# Altium PCB main_pcb.PcbDoc
Units mil, origin at the board's own origin, x right, y up, seen from the top; angles counter-clockwise.
Board outline 3500 x 2000 mil, 2 copper layers (Top Layer, Bottom Layer); 20 components, 16 nets, 56 pads, 6 vias.
Unrouted connection lines stored in the file: 38.
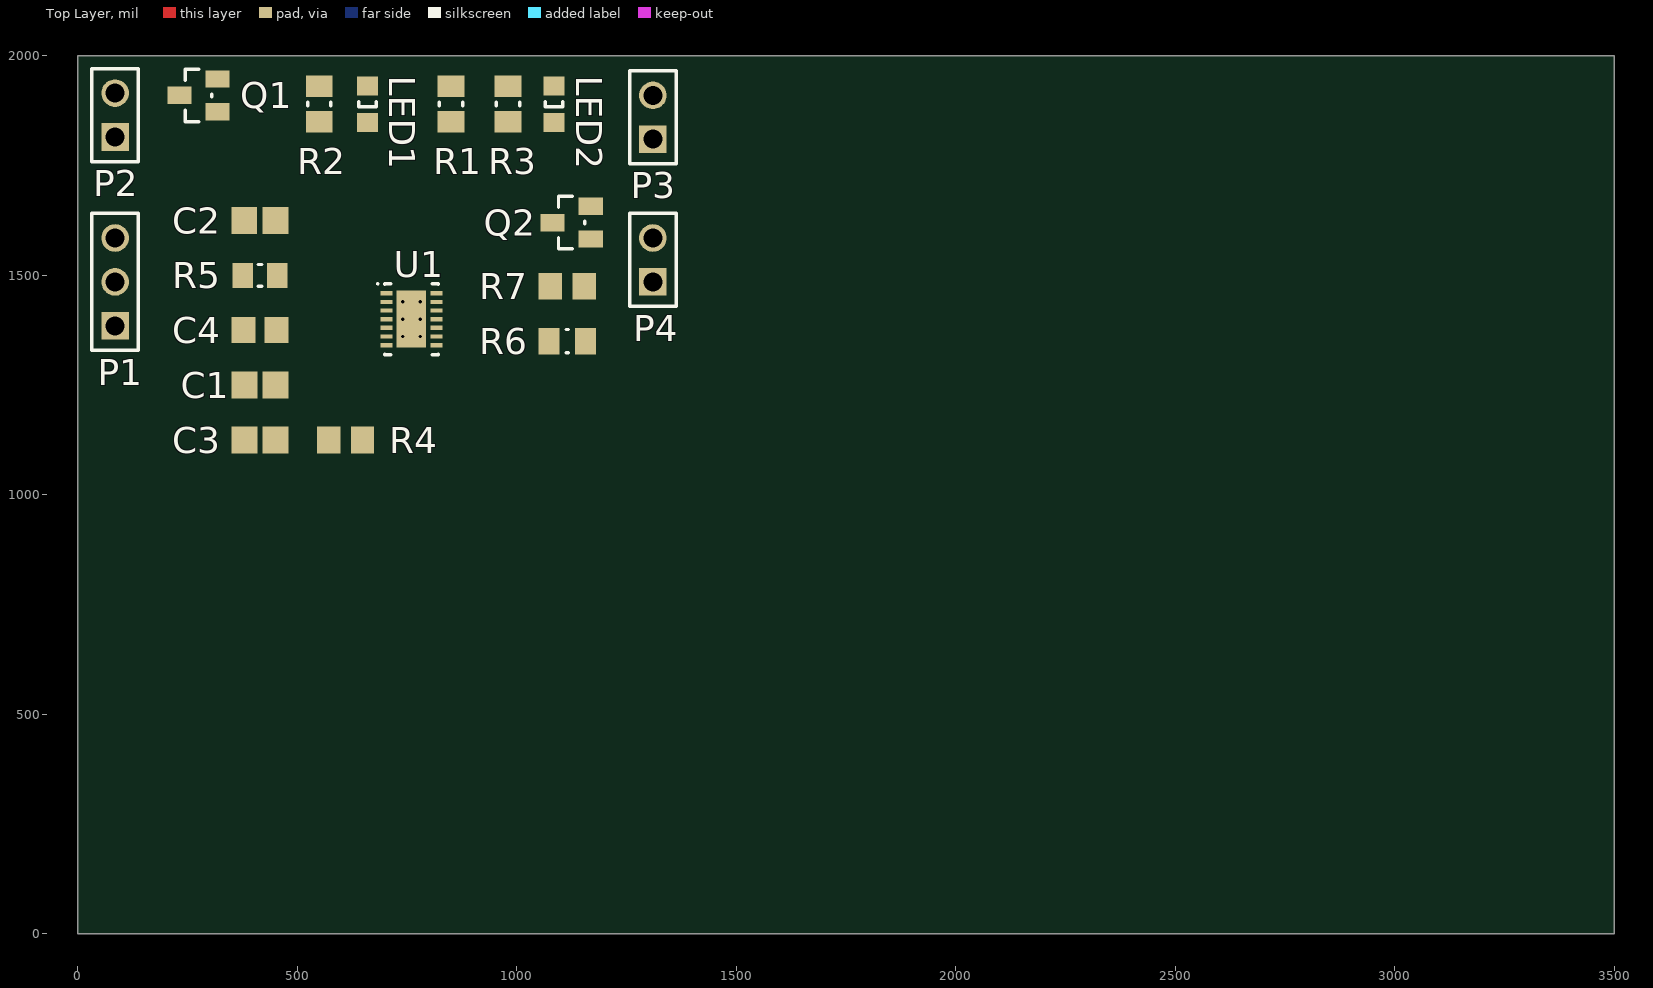
[diagram p0: Top Layer view]
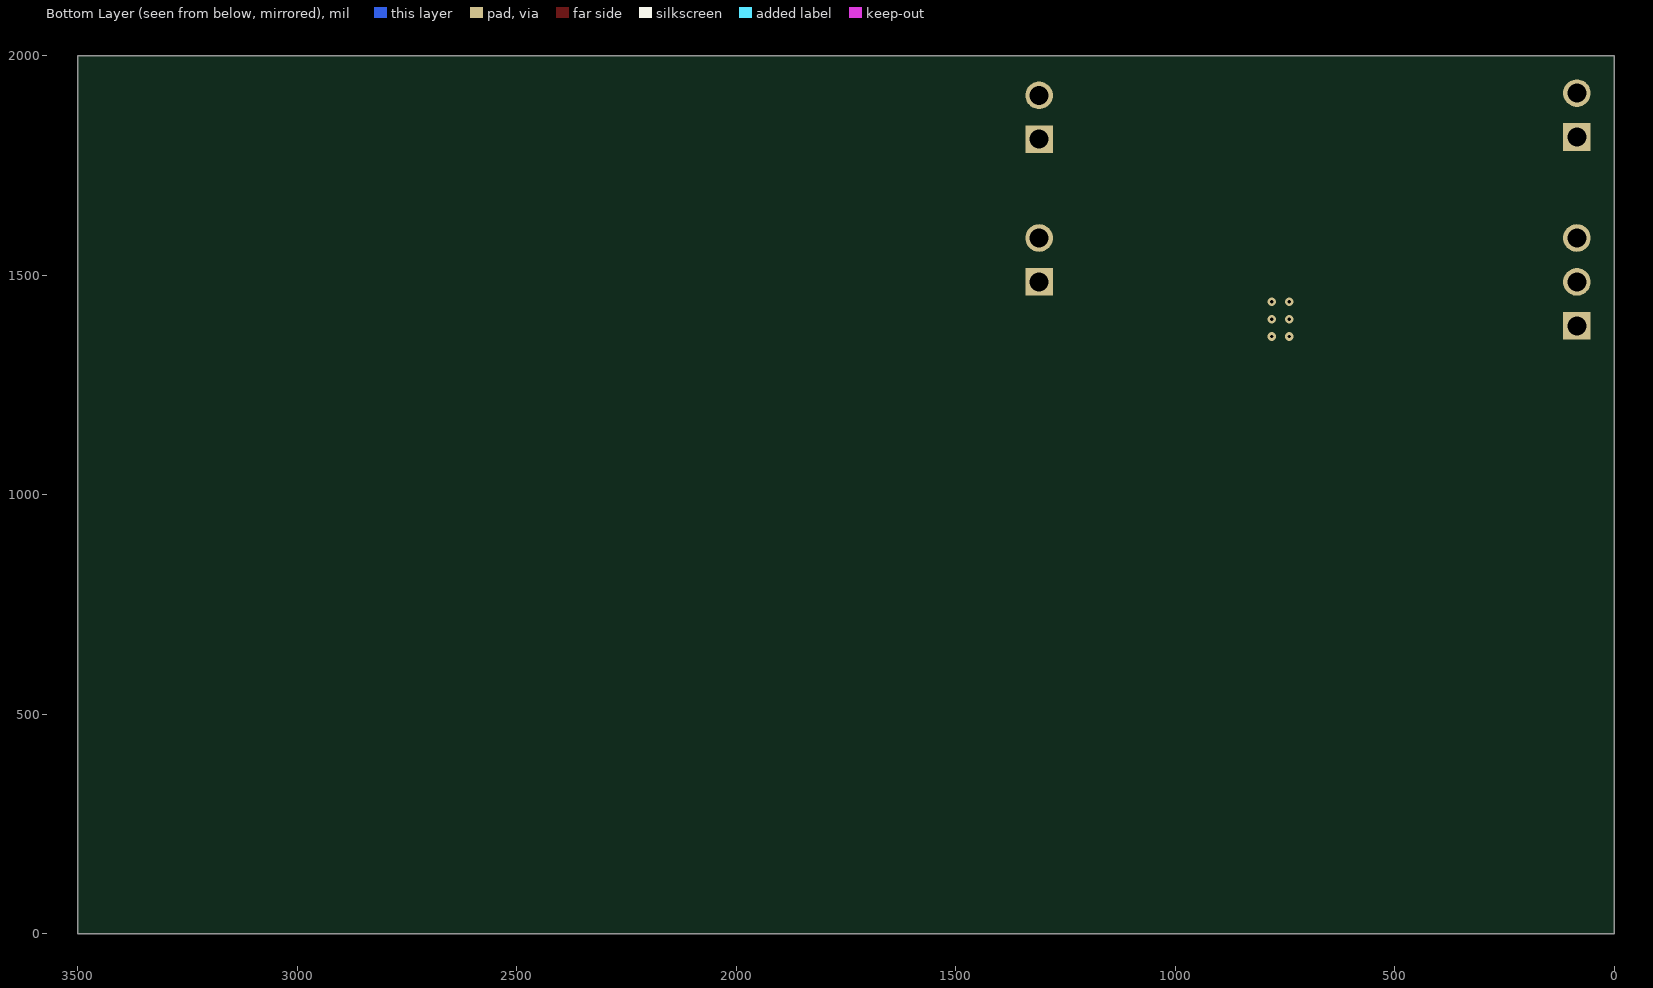
[diagram p1: Bottom Layer view, seen from below]

## Layer stack, top to bottom
Top Solder: solder mask 0.4, Solder Resist, Dk 3.5
Top Layer: signal copper 1.4
Dielectric 1: dielectric 12.6, FR-4, Dk 4.8
Bottom Layer: signal copper 1.4
Bottom Solder: solder mask 0.4, Solder Resist, Dk 3.5

## Board outline
0,0 3500,0 3500,2000 0,2000

## Design rules (kind name [scope] priority, off if disabled: settings)
BoardOutlineClearance [All] p1: gap=10 ignorepadtopadclearanceinfootprint=FALSE except(0: Arc-SplitContinuation Track-SplitContinuation SMDPad-SplitContinuation THPad-SplitContinuation Via-SplitContinuation Fill-SplitContinuation Poly-SplitContinuation Region-SplitContinuation Text-SplitContinuation)
Clearance [All] p1: gap=10 ignorepadtopadclearanceinfootprint=TRUE except(0: Arc-Hole Track-Hole SMDPad-Hole THPad-Hole Via-Hole Fill-Hole Poly-Hole Region-Hole Text-Hole)
PolygonConnect [All] p1: connectstyle=Relief reliefconductorwidth=10 reliefentries=4 polygonreliefangle="90 Angle" airgapwidth=10
RoutingVias [All] p1: holewidth=28 width=50 viastyle="Through Hole" minholewidth=28 minwidth=50 maxholewidth=28 maxwidth=50
SolderMaskExpansion [All] p1: expansion=4 istentingtop=FALSE
Width [All] p1: maxlimit=10 minlimit=10 preferedwidth=10
30 further rules are at their usual default settings.

## Components (designator, comment, footprint, x,y, rotation, side; value= is the part's Value field where it differs from the comment)
C1 "4.7uF" CAPC2013X145X50ML20T25 415,1250 r0 top
C2 "4.7uF" CAPC2013X145X50ML20T25 414.57,1625 r0 top
C3 "4.7uF" CAPC2013X145X50ML20T25 415,1125 r0 top
C4 "0.1uF" CAPC2013X135X45ML10T25 415,1375 r0 top
LED1 "Green" 0805_A 660,1890 r90 top
LED2 "Red" 0805_A 1085,1890 r90 top
P1 "Input" 61300311121 85,1485 r90 top
P2 "Output" 61300211121 85,1865 r90 top
P3 "Battery" 61300211121 1310,1860 r90 top
P4 "NTC" 61300211121 1310,1535 r90 top
Q1 "FDN340P" FP-527AG-MFG 275,1910 r180 top
Q2 "FDN340P" FP-527AG-MFG 1125,1620 r180 top
R1 "1K" RESC2013X50X30ML20T20 850,1890 r90 top
R2 "680" RESC2013X50X30ML20T20 550,1890 r90 top
R3 "680" RESC2013X50X30ML20T20 980,1890 r90 top
R4 "10K" RESC2013X70X40ML20T20 610,1125 r180 top
R5 "2K" RESC2013X60X35ML10T20 415,1500 r0 top
R6 "10K" RESC2012X145X30ML20T15 1115,1350 r180 top
R7 "100K" RESC2013X70X40ML20T20 1115,1475 r180 top
U1 "LTC4085EDE#TRPBF" LT-DE-14_V 760,1400 r0 top

## Footprints (in the part's own frame and the unit in brackets; to place one, negate y for a bottom-side part, rotate by r counter-clockwise, add the part's x,y. Pads: shape width x height; smd on the part's side, far side on the other; paste and mask are expansions set on the pad)
0805_A [mm] "Chip LED, 2-Leads, Body 2.0x1.3mm, IPC Medium Density"
  rect 1.1x1.2 smd: 1(-1.05,0) 2(1.05,0)
  silkscreen extent -0.15,-0.5 0.15,0.5, body extent -1,-0.62 1,0.63, height 0.68
61300211121 [mm] "Pin Header, pitch 2.54 mm, THT, Vertical, single row, 2p"
  rect 1.6x1.6 hole 1.1: 1(-1.27,0)
  round 1.6 hole 1.1: 2(1.27,0)
  silkscreen extent -2.69,-1.35 2.69,1.35, body extent -2.54,-1.27 2.54,1.27, height 8.57
61300311121 [mm] "Pin Header, pitch 2.54 mm, THT, Vertical, single row, 3p"
  rect 1.6x1.6 hole 1.1: 1(-2.54,0)
  round 1.6 hole 1.1: 2(0,0) 3(2.54,0)
  silkscreen extent -3.96,-1.35 3.96,1.35, body extent -3.81,-1.27 3.81,1.27, height 8.57
CAPC2013X135X45ML10T25 [mm] "Chip Capacitor, 2-Leads, Body 2.10x1.35mm, IPC Low Density"
  rect 1.4x1.5 smd: 1(-0.95,0) 2(0.95,0)
  body extent -1.05,-0.67 1.05,0.67, height 1.35
CAPC2013X145X50ML20T25 [mm] "Chip Capacitor, 2-Leads, Body 2.00x1.25mm, IPC Low Density"
  rect 1.5x1.55 smd: 1(-0.9,0) 2(0.9,0)
  body extent -1.1,-0.72 1.1,0.72, height 1.45
FP-527AG-MFG [mm]
  rect 1.4x1 smd paste+0 mask+0: 1(-1.1,0.95) 2(-1.1,-0.95) 3(1.1,0)
  silkscreen extent -0.76,-1.52 0.76,1.52, body extent -1.9,-1.62 1.9,1.62, height 0.25
LT-DE-14_V [mm] "SON, 14-Leads, Body 4x3mm, Pitch 0.5mm, Thermal Pad 3.3x1.7mm"
  rect 0.7x0.25 smd: 1(-1.45,1.5) 2(-1.45,1) 3(-1.45,0.5) 4(-1.45,0) 5(-1.45,-0.5) 6(-1.45,-1) 7(-1.45,-1.5) 8(1.45,-1.5) 9(1.45,-1) 10(1.45,-0.5) 11(1.45,0) 12(1.45,0.5) 13(1.45,1) 14(1.45,1.5)
  rect 1.7x3.3 smd: 15(0,0)
  silkscreen extent -2,-2.05 1.55,2.1, body extent -1.5,-2 1.5,2, height 0.8
RESC2012X145X30ML20T15 [mm] "Chip Resistor, 2-Leads, Body 2.01x1.25mm, IPC Low Density"
  rect 1.2x1.55 smd: 1(-1.05,0) 2(1.05,0)
  silkscreen extent -0.05,-0.67 0.05,0.67, body extent -1.11,-0.72 1.1,0.72, height 1.45
RESC2013X50X30ML20T20 [mm] "Chip Resistor, 2-Leads, Body 2.00x1.25mm, IPC Low Density"
  rect 1.25x1.55 smd: 1(-1.025,0) 2(1.025,0)
  silkscreen extent -0.1,-0.67 0.1,0.67, body extent -1.1,-0.72 1.1,0.72, height 0.5
RESC2013X60X35ML10T20 [mm] "Chip Resistor, 2-Leads, Body 2.00x1.25mm, IPC Low Density"
  rect 1.2x1.45 smd: 1(-1,0) 2(1,0)
  silkscreen extent -0.1,-0.63 0.1,0.63, body extent -1.05,-0.67 1.05,0.67, height 0.6
RESC2013X70X40ML20T20 [mm] "Chip Resistor, 2-Leads, Body 2.00x1.25mm, IPC Low Density"
  rect 1.35x1.55 smd: 1(-0.975,0) 2(0.975,0)
  body extent -1.1,-0.72 1.1,0.72, height 0.7

## Part data
C1 C2 C3: library part CMP-2007-01010-1, Manufacturer=Kemet, Part Number=C0805C475K3PACTU
C4: library part CMP-2100-03644-1, "Chip Capacitor, 0.1 uF, +/- 10%, 50 V, -55 to 125 degC, 0805 (2012 Metric), RoHS, Tape and Reel", Capacitance=100nF, Case Code (Imperial)=0805, Case Code (Metric)=2012, Dielectric=X7R, Dielectric Material=Ceramic, Insulation Resistance=10GR, Manufacturer=Murata, Max Operating Temperature=125degC, Min Operating Temperature=-55degC, Package Description="2-Pin Surface Mount Device, Body 2 x 1.25 mm", Package Quantity=1, Tolerance=10%, Voltage=50V, Case/Package=0805, Datasheet URL=http://psearch.en.murata.com/capacitor/product/GRM21BR71H104KA01%23.pdf, Datasheet Version=42675.0, Depth=1.25mm, Height=1.25mm, Lead Free=LeadFree, Length=2mm, Manufacturer URL=http://www.murata.com/, Material=Ceramic, Mount=SurfaceMount, Number of Pins=2, Package Reference=0805, Packaging=TapeandReel, Radiation Hardening=No, REACH SVHC=Unknown, RoHSCompliant=true, Termination=SMD/SMT, Thickness=0.053inch, Voltage Rating=50V, Voltage Rating (DC)=50V, Width=0.049inch
LED1: library part CMP-1426-00007-1, "SMD mono-color Chip LED, WL-SMCW, Green", Manufacturer="Wuerth Elektronik", PartNumber=150080GS75000, Color=Green, ComponentLink1Description="Manufacturer URL", ComponentLink1URL=http://www.we-online.com, ComponentLink2Description=Datasheet, ComponentLink2URL=http://katalog.we-online.com/led/datasheet/150080GS75000.pdf, PackageReference=0805_A
LED2: library part CMP-1426-00011-1, "SMD mono-color Chip LED, WL-SMCW, Red", Manufacturer="Wuerth Elektronik", PartNumber=150080RS75000, Color=Red, ComponentLink1Description="Manufacturer URL", ComponentLink1URL=http://www.we-online.com, ComponentLink2Description=Datasheet, ComponentLink2URL=http://katalog.we-online.com/led/datasheet/150080RS75000.pdf, PackageReference=0805_A
P1: library part CMP-1502-01062-1, "THT Vertical Pin Header WR-PHD, Pitch 2.54 mm, Single Row, 3 pins", Contact Resistance=20mOhm, Manufacturer="Wurth Elektronik", Operating Temperature=-40to105degC, Package Reference=61300311121, Rated Current=3A, Withstanding Voltage=500VAC, Working Voltage=250VAC, Datasheet URL=https://katalog.we-online.de/em/datasheet/6130xx11121.pdf, Gender=Male, Manufacturer URL=http://www.we-online.de, Mounting Technology=THT, Orientation=Vertical, Packaging=Bag, Part Number=61300311121, Pin Number=3, Pitch=2.54mm, Publisher=WurthElektronik, Row Number=Single
P2 P3 P4: library part CMP-1712-00002-4, "THT Vertical Pin Header WR-PHD, Pitch 2.54 mm, Single Row, 2 pins", Contact Resistance=20mOhm, Manufacturer="Wurth Elektronik", Operating Temperature=-40to105degC, Package Reference=61300211121, Rated Current=3A, Withstanding Voltage=500VAC, Working Voltage=250VAC, Datasheet URL=https://katalog.we-online.de/em/datasheet/6130xx11121.pdf, Gender=Male, Manufacturer URL=http://www.we-online.de, Mounting Technology=THT, Orientation=Vertical, Packaging=Bag, Part Number=61300211121, Pin Number=2, Pitch=2.54mm, Publisher=WurthElektronik, Row Number=Single
Q1 Q2: library part CMP-2100-03638-2, "MOSFET P-CH 20V 2A SSOT3", Case/Package=SOT-23, Continuous Drain Current (ID)=2A, Current Rating=-2A, Drain to Source Breakdown Voltage=-20V, Drain to Source Resistance=60mR, Drain to Source Voltage (Vdss)=20V, Gate to Source Voltage (Vgs)=8V, Input Capacitance=779pF, Max Operating Temperature=150°C, Max Power Dissipation=500mW, Min Operating Temperature=-55°C, On-State Resistance=70MR, Package Quantity=1, Threshold Voltage=-800mV, Contact Plating=Tin, Dual Supply Voltage=-20V, Element Configuration=Single, Fall Time=11ns, Height=0.94mm, Lead Free="Lead Free", Length=2.92mm, Mount="Surface Mount", Nominal Vgs=-800mV, Number of Elements=1, Number of Pins=3, Packaging="Tape and Reel", Power Dissipation=500mW, Radiation Hardening=No, Rds On Max=70mR, REACH SVHC="No SVHC", Rise Time=9ns, Termination=SMD/SMT, Turn-Off Delay Time=27ns, Turn-On Delay Time=10ns, Voltage Rating (DC)=-20V, Weight=0.03g, Width=3.05mm
R1: library part CMP-1013-00510-2, Manufacturer="Vishay Dale", Part Number=CRCW08051K00FKEA
R2 R3: library part CMP-2001-04066-1, Manufacturer="Vishay Dale", Part Number=CRCW0805680RFKEA
R4: library part CMP-2001-00337-1, Manufacturer=Panasonic, Part Number=ERJ-6GEYJ103V
R5: library part CMP-2001-01361-1, Manufacturer=Yageo, Part Number=RC0805JR-072KL
R6: library part CMP-2001-04354-1, Manufacturer="Vishay Dale", Part Number=NTHS0805N02N1002JE
R7: library part CMP-2001-00338-1, Manufacturer=Panasonic, Part Number=ERJ-6GEYJ104V
U1: library part CMP-0478-00061-1, "USB Power Manager with Ideal Diode Controller and Li-Ion Charger with 4.2 V Float Voltage, 29% Vvntc, Undervoltage Current Limit, 4.35 to 5.5 V Vin, 14-pin SON (DE-14), -40 to 85 degC, Pb-Free, Tape and Reel", Manufacturer="Linear Technology", Code_JEDEC=MO-229, ComponentLink1Description="Manufacturer URL", ComponentLink1URL=http://www.linear.com/, ComponentLink2Description=Datasheet, ComponentLink2URL=http://cds.linear.com/docs/en/datasheet/4085fd.pdf, ComponentLink3Description="Package Specification", ComponentLink3URL=http://www.linear.com/docs/en/packaging/DFN_14_05-08-1708.pdf, DatasheetVersion="Rev. D", Mounting Technology="Surface Mount", Number of Cells=1, Number of Outputs=1, PackageDescription="14-Pin Plastic DFN, Body 4 x 3 mm, Pitch 0.5 mm", PackageReference=DE-14, PackageVersion="Rev. B, 06/2010", Packing="Tape and Reel", PartNumber=LTC4085EDE#TRPBF, RoHS=TRUE, Vin Max(V)=5.5, Vin Min(V)=4.35

## Via types
v1: diameter 19.68, hole 7.87, Top Layer to Bottom Layer, 6 vias

## Nets (pads, with @x,y where several pads share a name; then routed paths per layer and width w, separated by ;. In a path a pad name is that pad's centre, name@x,y a point inside that pad or via, vN(x,y) a via of type N, cw(c..) or ccw(c..) an arc to the next point about the centre after c; other vN are vias at no path point)
5V_usb: C3.2 P1.2 R4.2 U1.1
5V_wall: C1.2 P1.3 Q1.3 U1.7
Battery: P3.2 Q2.2 U1.14
GND: C1.1 C2.1 C3.1 C4.1 P1.1 P2.1 P3.1 P4.1 R5.1 R7.1
LED_acpr: LED1.1 Q1.1 R1.1 U1.10
LED_chrg: LED2.1 U1.11
NetC4_2: C4.2 U1.6
NetLED1_2: LED1.2 R2.1
NetLED2_2: LED2.2 R3.1
NetQ2_1: Q2.1 U1.13
NetR4_1: R4.1 U1.4
NetR5_2: R5.2 U1.3
NetR6_2: R6.2 U1.9
NetR7_2: R7.2 U1.12
NTC: P4.2 R6.1 U1.8
Output: C2.2 P2.2 Q1.2 Q2.3 R1.2 R2.2 R3.2 U1.2
pads on no net: U1.5 U1.15
copper on no net:
  other v1: 740.32,1360.63 779.69,1360.63 740.32,1400 779.69,1400 740.32,1439.37 779.69,1439.37